# EAGLE board Robo_opcao (EAGLE 9.5.1)
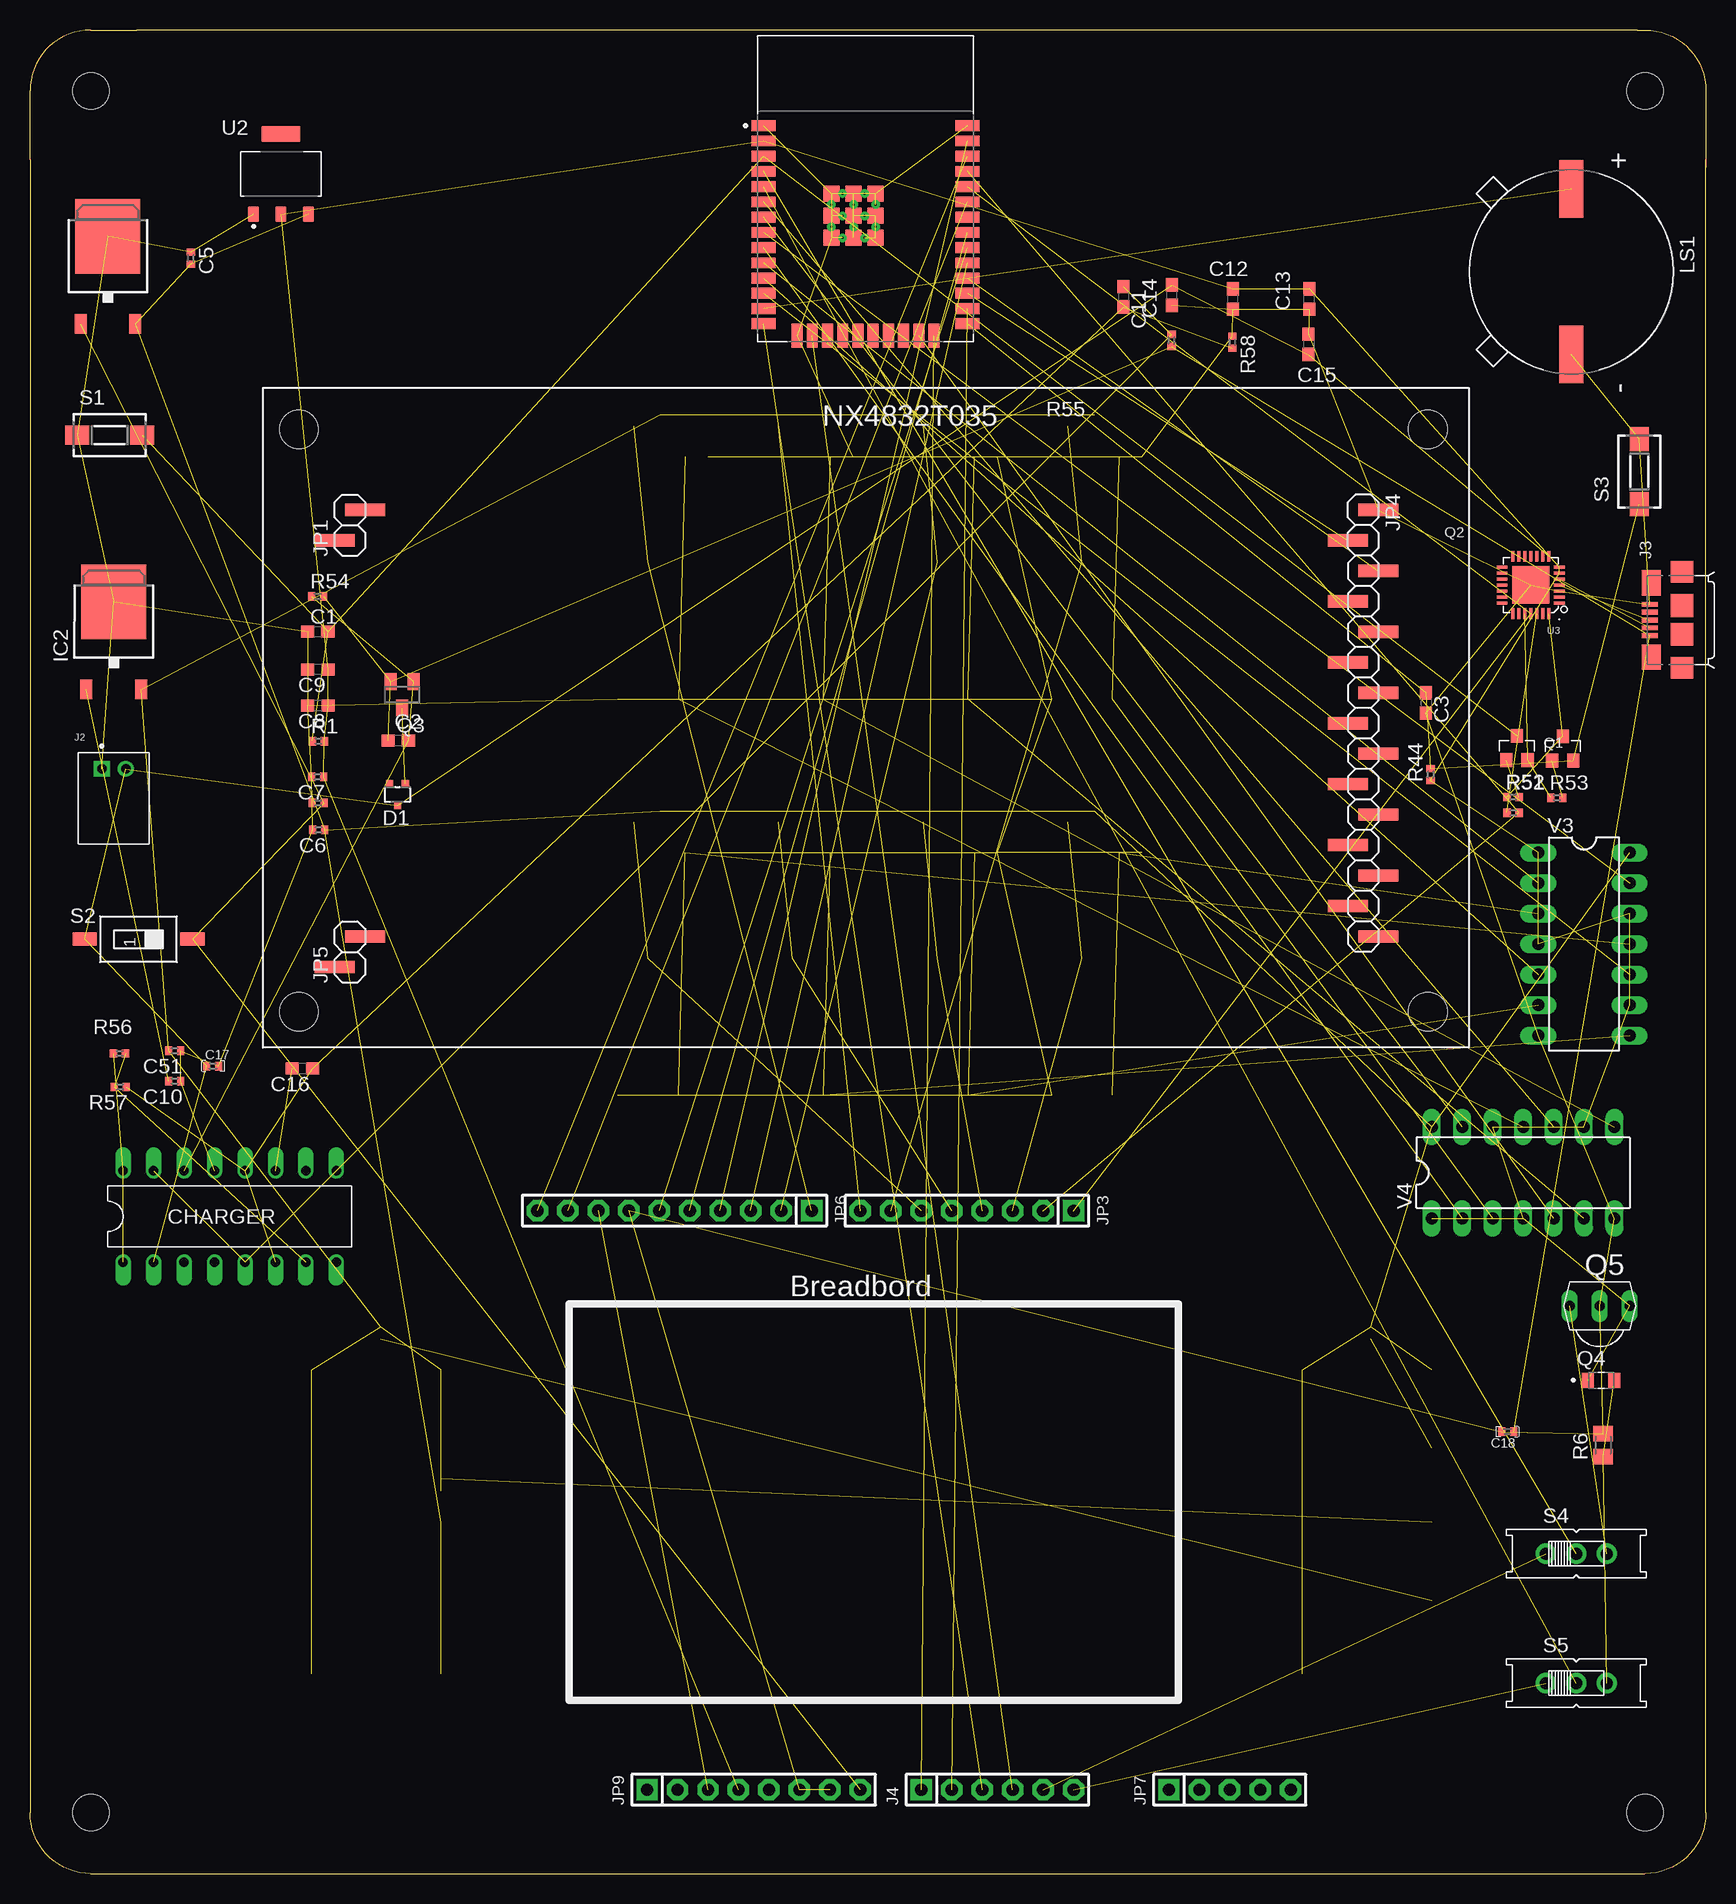
[diagram p0: board, top side]
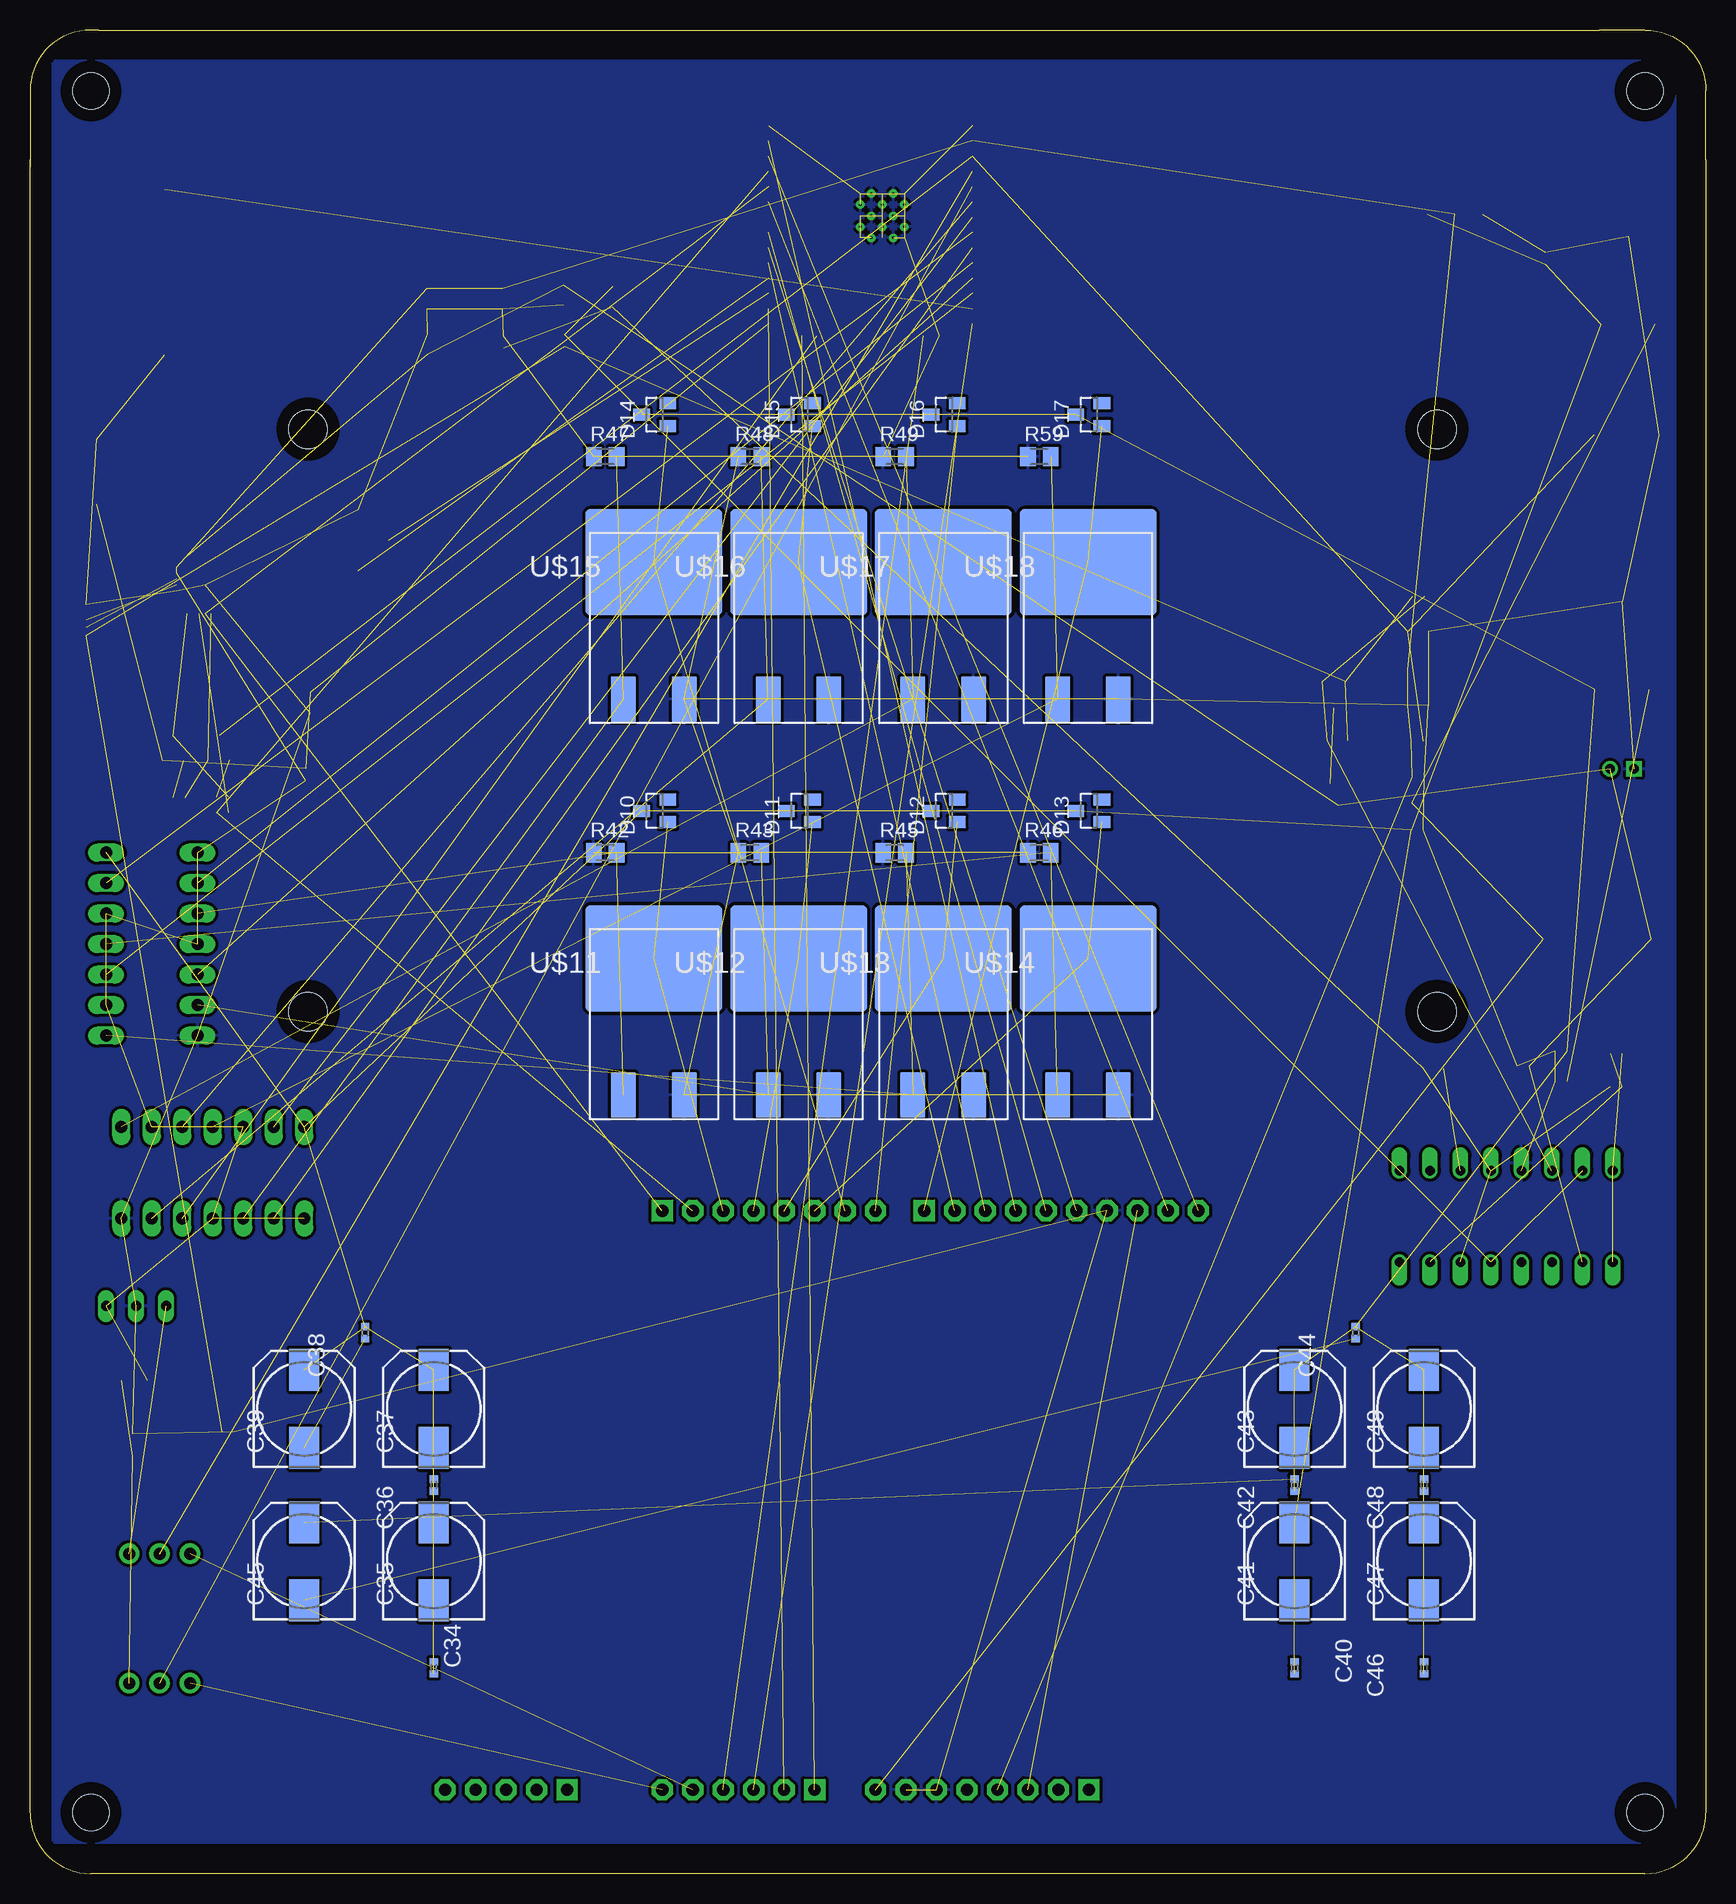
[diagram p1: board, bottom side, seen from below]

Size 139.7 x 153.67 mm. Coordinates in mm from the lower left corner, seen from the top.
Outline: 139.7,142.24 139.7,5.08 arc-90 134.62,0 5.08,0 arc-90 0,5.08 0,142.88 0,148.59 arc-90 5.08,153.67 8.89,153.67 133.99,153.67 134.62,153.67 arc-90 139.7,148.59 139.7,142.24
Outline: 139.7,142.24 139.7,142.88
Copper layers (1*16): Top 0.035mm / dielectric 1.5mm / Bottom 0.035mm
Design rules "default *": minimum track width 8mil, minimum drill 6mil, track to track 6mil, track to pad 6mil, pad to pad 6mil, via to via 6mil, smd to smd 6mil, copper to edge 40mil, drill to drill 6mil, minimum pad ring 10mil, minimum via ring 8mil, stop-mask expansion 4mil, vias tented up to drill 0mil, thermal gap 10mil
Net classes: 0 default: width 0.61 mm, drill 0.61 mm, clearance 0.254 mm; 1 x: width 0.203 mm, drill 0.508 mm, clearance 0.254 mm
Holes 3 mm at 5.08,148.59 5.08,5.08 134.62,148.59 134.62,5.08

## Footprints (pad centres in the part's own frame; a part is rotated, then mirrored left to right if it is on the bottom)
ARDUINO_R3 = drill 1.016 pad 1.93: 3.3V 2.54,-24.13; 5V 5.08,-24.13; A0 17.78,-24.13; A1 20.32,-24.13; A2 22.86,-24.13; A3 25.4,-24.13; A4 27.94,-24.13; A5 30.48,-24.13; AREF -9.144,24.13; D0 30.48,24.13; D1 27.94,24.13; D2 25.4,24.13; D3 22.86,24.13; D4 20.32,24.13; D5 17.78,24.13; D6 15.24,24.13; D7 12.7,24.13; D8 8.636,24.13; D9 6.096,24.13; D10 3.556,24.13; D11 1.016,24.13; D12 -1.524,24.13; D13 -4.064,24.13; GND@1 7.62,-24.13; GND@2 10.16,-24.13; GND@3 -6.604,24.13; GND@4 33.16,-1.32; IOREF -2.54,-24.13; MISO 30.62,3.76; MOSI 33.16,1.22; NC -5.08,-24.13; RESET@1 0,-24.13; RESET@2 30.62,-1.32; SCK 30.62,1.22; SCL -14.224,24.13; SDA -11.684,24.13; VCC 33.16,3.76; VIN 12.7,-24.13 | hole 3.175: -17.78,24.13; 33.02,8.89; 33.02,-19.05; -19.05,-24.13
C0603 = smd 1.1 x 1: 1 -0.85,0; 2 0.85,0
0402 = smd 0.6 x 0.7: 1 -0.5,0; 2 0.5,0
0402_POL = smd 0.6 x 0.7: P+ -0.5,0; P- 0.5,0
150CLZ-0810 = smd 3.5 x 2.5: + 3.25,0; - -3.25,0
DIP14 = drill 0.8 offset: P$1 -3.81,8.89; P$2 -3.81,6.35; P$3 -3.81,3.81; P$4 -3.81,1.27; P$5 -3.81,-1.27; P$6 -3.81,-3.81; P$7 -3.81,-6.35; P$8 -3.81,-8.89; P$9 3.81,-8.89; P$10 3.81,-6.35; P$11 3.81,-3.81; P$12 3.81,-1.27; P$13 3.81,1.27; P$14 3.81,3.81; P$15 3.81,6.35; P$16 3.81,8.89
SOT323 = smd 0.6 x 0.55: 1 -0.65,-0.925; 2 0.65,-0.925; 3 0,0.925
SOT23 = smd 1 x 1.4: 1 -0.95,-1.1; 2 0.95,-1.1; 3 0,1.1
TO252 = smd 1 x 1.6: 1 -2.28,-4.8; 2 2.28,-4.8 | smd 5.4 x 6.2: 3 0,2.5
JST_S2B-PH-K-S(LF)(SN) = drill 0.8 square: 1 -1,0 | drill 0.8: 2 1,0
ZX62-B-5PA(11) = smd 0.4 x 1.35: 1 -1.3,2.675; 2 -0.65,2.675; 3 0,2.675; 4 0.65,2.675; 5 1.3,2.675 | smd 2.1 x 1.6: SH1 -3.1,2.55; SH2 3.1,2.55 | smd 1.8 x 1.9: SH3 -4,0; SH6 4,0 | smd 1.9 x 1.9: SH4 -1.2,0; SH5 1.2,0
SIP-100-06-40 = drill 1.016 pad 1.778 square: 1 -6.35,0 | drill 1.016 pad 1.778 octagon: 2 -3.81,0; 3 -1.27,0; 4 1.27,0; 5 3.81,0; 6 6.35,0
1X02SMD = smd 1.016 x 3.302: 1 -1.27,1.27; 2 1.27,-1.27
SIP-100-08-40 = drill 1.016 pad 1.778 square: 1 -8.89,0 | drill 1.016 pad 1.778 octagon: 2 -6.35,0; 3 -3.81,0; 4 -1.27,0; 5 1.27,0; 6 3.81,0; 7 6.35,0; 8 8.89,0
1X15SMD = smd 1.016 x 3.302: 1 -1.27,1.27; 2 1.27,-1.27; 3 3.81,1.27; 4 6.35,-1.27; 5 8.89,1.27; 6 11.43,-1.27; 7 13.97,1.27; 8 16.51,-1.27; 9 19.05,1.27; 10 21.59,-1.27; 11 24.13,1.27; 12 26.67,-1.27; 13 29.21,1.27; 14 31.75,-1.27; 15 34.29,1.27
SIP-100-10-40 = drill 1.016 pad 1.778 square: 1 -11.43,0 | drill 1.016 pad 1.778 octagon: 2 -8.89,0; 3 -6.35,0; 4 -3.81,0; 5 -1.27,0; 6 1.27,0; 7 3.81,0; 8 6.35,0; 9 8.89,0; 10 11.43,0
SIP-100-05-40 = drill 1.016 pad 1.778 square: 1 -5.08,0 | drill 1.016 pad 1.778 octagon: 2 -2.54,0; 3 0,0; 4 2.54,0; 5 5.08,0
XDCR_CPT-1762_ROBO = smd 4.8 x 2: N 6.9,0; P -6.9,0
SOT-23 = smd 1.016 x 1.143: 1 -0.889,-1.016; 2 0.889,-1.016; 3 0,1.016
TRANS_SFH_3716 = smd 1 x 1.25: 1 -1.1,0; 2 1.1,0
TSOP18XX = drill 0.813 long: GND -0.001,-0.027; OUT -2.501,-0.027; VCC 2.499,-0.027
M0805 = smd 1.3 x 1.6: 1 -0.95,0; 2 0.95,0
DTSM-3 = smd 2 x 1.6: 1 -2.7,0; 2 2.7,0
SMS-001 = smd 1.092 x 2.007: 1 0,-4.496; 2 0,4.496
EG1218_ROBO = drill 1 pad 1.676: O -2.54,0; P 0,0; S 2.54,0
MODULE_ESP32-WROOM-32D = smd 2 x 0.9: 1 -8.5,5.26; 2 -8.5,3.99; 3 -8.5,2.72; 4 -8.5,1.45; 5 -8.5,0.18; 6 -8.5,-1.09; 7 -8.5,-2.36; 8 -8.5,-3.63; 9 -8.5,-4.9; 10 -8.5,-6.17; 11 -8.5,-7.44; 12 -8.5,-8.71; 13 -8.5,-9.98; 14 -8.5,-11.25; 25 8.5,-11.25; 26 8.5,-9.98; 27 8.5,-8.71; 28 8.5,-7.44; 29 8.5,-6.17; 30 8.5,-4.9; 31 8.5,-3.63; 32 8.5,-2.36; 33 8.5,-1.09; 34 8.5,0.18; 35 8.5,1.45; 36 8.5,2.72; 37 8.5,3.99; 38 8.5,5.26 | smd 0.9 x 2: 15 -5.715,-12.25; 16 -4.445,-12.25; 17 -3.175,-12.25; 18 -1.905,-12.25; 19 -0.635,-12.25; 20 0.635,-12.25; 21 1.905,-12.25; 22 3.175,-12.25; 23 4.445,-12.25; 24 5.715,-12.25 | smd 1.33 x 1.33: 39_1 -2.835,-0.405; 39_2 -1,-0.405; 39_3 0.835,-0.405; 39_4 -2.835,-2.24; 39_5 -1,-2.24; 39_6 0.835,-2.24; 39_7 -2.835,-4.075; 39_8 -1,-4.075; 39_9 0.835,-4.075 | drill 0.2 pad 0.3: 39_10 -1.917,-0.405; 39_11 -0.083,-0.405; 39_12 -2.835,-1.323; 39_13 -1,-1.323; 39_14 0.835,-1.323; 39_15 -1.917,-2.24; 39_16 -0.083,-2.24; 39_17 -2.835,-3.158; 39_18 -1,-3.158; 39_19 0.835,-3.158; 39_20 -1.917,-4.075; 39_21 -0.083,-4.075
SOT229P700X180-4N = smd 0.93 x 1.31: 1 -2.29,-3.345; 2 0,-3.345; 3 2.29,-3.345 | smd 3.24 x 1.31: 4 0,3.345
QFN28G_0.5-5X5MM_ROBO = smd 0.9 x 0.254: 1 -2.384,1.5; 2 -2.384,1; 3 -2.384,0.5; 4 -2.384,0; 5 -2.384,-0.5; 6 -2.384,-1; 7 -2.384,-1.5; 15 2.384,-1.5; 16 2.384,-1; 17 2.384,-0.5; 18 2.384,0; 19 2.384,0.5; 20 2.384,1; 21 2.384,1.5 | smd 0.254 x 0.9: 8 -1.5,-2.384; 9 -1,-2.384; 10 -0.5,-2.384; 11 0,-2.384; 12 0.5,-2.384; 13 1,-2.384; 14 1.5,-2.384; 22 1.5,2.384; 23 1,2.384; 24 0.5,2.384; 25 0,2.384; 26 -0.5,2.384; 27 -1,2.384; 28 -1.5,2.384 | smd 3.1 x 3.1: 29 0,0
NEXTION = hole 3.2: 4,50.54; 4,2; 98.1,2; 98.1,50.54
SMD = smd 2.08 x 3.81: 1 2.79,-13.85; 3 7.86,-13.85 | smd 11.43 x 8.89: 2 5.33,-2.45
DIL14_FT = drill 1 long: 1 -7.62,-3.81; 2 -5.08,-3.81; 3 -2.54,-3.81; 4 0,-3.81; 5 2.54,-3.81; 6 5.08,-3.81; 7 7.62,-3.81; 8 7.62,3.81; 9 5.08,3.81; 10 2.54,3.81; 11 0,3.81; 12 -2.54,3.81; 13 -5.08,3.81; 14 -7.62,3.81

## Placement (x,y rotation side)
B1  ARDUINO_UNO_R3  [ARDUINO_R3]  173.35,-31.11 0 top  (outside the outline)
C1  0,1 uF  [C0603]  23.99,103.52 0 top
C2  0,01 uF  [C0603]  30.7,94.46 0 top
C3  0,1 uF  [C0603]  116.36,97.57 270 top
C4  0.33uF  [0402]  24.02,89.24 0 top
C5  0.1uF  [0402]  13.4,134.65 270 top
C6  0.1uF  [0402]  24.07,86.99 180 top
C7  22uF  [0402]  23.97,91.41 180 top
C8  0,1 uF  [C0603]  24,97.34 180 top
C9  10 uF  [C0603]  24.01,100.36 180 top
C10  0.33uF  [0402]  12.06,66.04 180 top
C11  1 uF  [C0603]  91.13,131.44 270 top
C12  10 uF  [C0603]  100.29,131.24 90 top
C13  0,1 uF  [C0603]  106.64,131.24 90 top
C14  0,1 uF  [C0603]  95.21,131.56 90 top
C15  10 uF  [C0603]  106.58,127.48 270 top
C16  0.01 uF  [C0603]  22.7,67.09 180 top
C17  10uF  [0402_POL]  15.24,67.31 0 top
C18  20uF  [0402_POL]  123.19,36.83 180 top
C34  100n  [0402]  106.05,17.14 270 bottom
C35  470u  [150CLZ-0810]  106.05,26.04 90 bottom
C36  100n  [0402]  106.05,32.38 90 bottom
C37  470u  [150CLZ-0810]  106.05,38.73 90 bottom
C38  100n  [0402]  111.76,45.09 90 bottom
C39  470u  [150CLZ-0810]  116.84,38.73 90 bottom
C40  100n  [0402]  34.29,17.14 270 bottom
C41  470u  [150CLZ-0810]  34.29,26.04 90 bottom
C42  100n  [0402]  34.29,32.38 90 bottom
C43  470u  [150CLZ-0810]  34.29,38.73 90 bottom
C44  100n  [0402]  29.21,45.09 90 bottom
C45  470u  [150CLZ-0810]  116.84,26.04 90 bottom
C46  100n  [0402]  23.5,17.14 90 bottom
C47  470u  [150CLZ-0810]  23.5,26.04 90 bottom
C48  100n  [0402]  23.5,32.38 90 bottom
C49  470u  [150CLZ-0810]  23.5,38.73 90 bottom
C51  0.1uF  [0402]  12.06,68.58 180 top
CHARGER  MAX712  [DIP14]  16.65,54.78 90 top
D1  HSMS-285B  [SOT323]  30.64,89.95 180 top
D10  BAS40  [SOT23]  87.63,88.58 90 bottom
D11  BAS40  [SOT23]  75.56,88.58 90 bottom
D12  BAS40  [SOT23]  63.5,88.58 90 bottom
D13  BAS40  [SOT23]  51.44,88.58 90 bottom
D14  BAS40  [SOT23]  87.63,121.6 90 bottom
D15  BAS40  [SOT23]  75.56,121.6 90 bottom
D16  BAS40  [SOT23]  63.5,121.6 90 bottom
D17  BAS40  [SOT23]  51.44,121.6 90 bottom
IC1  7805DT  [TO252]  6.49,133.97 0 top
IC2  7805DT  [TO252]  6.99,103.5 0 top
J2  S2B-PH-K-S(LF)(SN)  [JST_S2B-PH-K-S(LF)(SN)]  6.99,92.08 0 top
J3  ZX62-B-5PA  [ZX62-B-5PA(11)]  137.71,104.49 90 top
J4  F-1X06-SIP-100-40  [SIP-100-06-40]  80.64,6.99 0 top
JP1  [1X02SMD]  26.67,112.39 90 top
JP3  F-1X08-SIP-100-40  [SIP-100-08-40]  78.11,55.24 180 top
JP4  [1X15SMD]  111.12,112.39 270 top
JP5  [1X02SMD]  26.67,76.83 90 top
JP6  F-1X10-SIP-100-40  [SIP-100-10-40]  53.73,55.25 180 top
JP7  F-1X05-SIP-100-40  [SIP-100-05-40]  100.01,6.99 0 top
JP9  F-1X08-SIP-100-40  [SIP-100-08-40]  60.33,6.99 0 top
LS1  CPT-1762-90-SMT-TRXDCR_CPT-1762_ROBO  [XDCR_CPT-1762_ROBO]  128.48,133.52 270 top
Q1  SMD-TRANSISTORS-NPN-25V-500MW(SOT-23)  [SOT-23]  123.95,93.82 0 top
Q2  SMD-TRANSISTORS-NPN-25V-500MW(SOT-23)  [SOT-23]  127.76,93.79 0 top
Q3  [SOT23]  31.02,98.27 180 top
Q4  SFH_3716  [TRANS_SFH_3716]  130.97,41.12 0 top
Q5  TSOP4838  [TSOP18XX]  130.85,47.33 0 top
R1  10k  [0402]  24.04,94.39 0 top
R6  1k  [M0805]  131.13,35.72 90 top
R42  10k  [M0805]  91.76,85.09 0 bottom
R43  10k  [M0805]  79.69,85.09 0 bottom
R44  10k  [0402]  116.74,91.6 90 top
R45  10k  [M0805]  67.63,85.09 0 bottom
R46  10k  [M0805]  55.56,85.09 0 bottom
R47  10k  [M0805]  91.76,118.11 0 bottom
R48  10k  [M0805]  79.69,118.11 0 bottom
R49  10k  [M0805]  67.63,118.11 0 bottom
R51  470R  [0402]  123.62,88.42 0 top
R52  10k  [0402]  123.62,89.74 0 top
R53  10k  [0402]  127.27,89.68 0 top
R54  150R  [0402]  23.97,106.46 0 top
R55  680R  [0402]  95.15,127.79 270 top
R56  68k  [0402]  7.46,68.36 0 top
R57  22k  [0402]  7.52,65.56 180 top
R58  1R  [0402]  100.23,127.64 270 top
R59  10k  [M0805]  55.56,118.11 0 bottom
S1  EN  [DTSM-3]  6.64,119.89 0 top
S2  SWS001  [SMS-001]  9.05,77.89 270 top
S3  BOOT  [DTSM-3]  134.16,116.85 90 top
S4  EG1218  [EG1218_ROBO]  128.91,26.67 0 top
S5  EG1218  [EG1218_ROBO]  128.91,15.88 0 top
U1  ESP32-WROOM-32D  [MODULE_ESP32-WROOM-32D]  69.65,140.43 0 top
U2  AMS1117-3.3  [SOT229P700X180-4N]  20.93,141.67 0 top
U3  INTERFACE-CP2102-GMR(QFN28)QFN28G_ROBO  [QFN28G_0.5-5X5MM_ROBO]  125.09,107.41 180 top
U$1  [NEXTION]  18.42,69.85 0 top
U$11  IRFZ44NSMD  [SMD]  93.03,78.74 0 bottom
U$12  IRFZ44NSMD  [SMD]  80.96,78.74 0 bottom
U$13  IRFZ44NSMD  [SMD]  68.9,78.74 0 bottom
U$14  IRFZ44NSMD  [SMD]  56.83,78.74 0 bottom
U$15  IRFZ44NSMD  [SMD]  93.03,111.76 0 bottom
U$16  IRFZ44NSMD  [SMD]  80.96,111.76 0 bottom
U$17  IRFZ44NSMD  [SMD]  68.9,111.76 0 bottom
U$18  IRFZ44NSMD  [SMD]  56.83,111.76 0 bottom
V3  7408  [DIL14_FT]  129.54,77.47 270 top
V4  7408  [DIL14_FT]  124.46,58.42 0 top

## Library data of the parts
B1 = SparkFun-Boards
C1-C3 C8 C9 C11-C16 C35 C37 C39 C41 C43 C45 C47 C49 = rcl; SPICEPREFIX: C
C4-C7 C10 C17 C18 C34 C36 C38 C40 C42 C44 C46 C48 C51 R1 R44 R51-R58 = Perfect_0402
CHARGER = MAX712; AVAILABILITY: Unavailable; DESCRIPTION: Charger IC Multi-Chemistry 16-SOIC; MF: Maxim Integrated; MP: MAX712; PACKAGE: SOIC-16 Maxim Integrated; PRICE: None
D1 = avago
D10-D17 = diode
IC1 IC2 = linear
J2 = S2B-PH-K-S_LF__SN_; DESCRIPTION: Connector Header Through Hole, Right Angle 2 position; DIGI-KEY_PART_NUMBER: 455-1719-ND; MF: JST Sales America Inc.; MP: S2B-PH-K-S(LF)(SN); PACKAGE: Custom Package JST Sales America Inc.
J3 = ZX62-B-5PA; DESCRIPTION: USB - micro B USB 2.0 Receptacle Connector 5 Position Surface Mount, Right Angle; DIGI-KEY_PART_NUMBER: H11579CT-ND; MF: Hirose; MP: ZX62-B-5PA; PACKAGE: None
J4 JP3 JP6 JP7 JP9 = con-headers-jp(1)
JP1 JP4 JP5 = pinhead-1
LS1 = CPT-1762-90-SMT-TR
Q1 Q2 = SMD-TRANSISTORS-NPN-25V-500MW_SOT-23_; AVAILABILITY: Unavailable; DESCRIPTION: Bipolar (BJT) Transistor NPN 25V 1.5A 100MHz 625mW Surface Mount SOT-23; MF: Recom Power; MP: S8050; PACKAGE: SOT-23 Micro Commercial; PRICE: None
Q3 = semicon-smd-ipc
Q4 = SFH_3716; DESCRIPTION: Phototransistors 570nm Top View 0805 (2012 Metric); DIGI-KEY_PART_NUMBER: SFH3716-ND; MF: OSRAM Opto; MP: SFH 3716; PACKAGE: 0805 OSRAM Opto Semiconductors Inc.
Q5 = tsop
R6 R42 R43 R45-R49 R59 = rcl; SPICEPREFIX: R
S1 S3 = switch-tact
S2 = smd-special
S4 S5 = EG1218(1)
U1 = ESP32-WROOM-32D; AVAILABILITY: Unavailable; DESCRIPTION: Bluetooth, WiFi 802.11b/g/n, Bluetooth v4.2 +EDR, Class 1, 2 and 3 Transceiver Module 2.4GHz ~ 2.5GHz Integrated, Trace Surface Mount; MF: Espressif Systems; MP: ESP32-WROOM-32D; PACKAGE: Module Espressif Systems; PRICE: None
U2 = AMS1117-3.3; AVAILABILITY: Unavailable; DESCRIPTION: Sot223/Pkg 1-Amp 3.3-Volt Low Drop Out Voltage Regulatator; MF: Advanced Monolithic Systems; MP: AMS1117-3.3; PACKAGE: None; PRICE: None
U3 = INTERFACE-CP2102-GMR_QFN28_
U$1 = Nextion
U$11-U$18 = IRFZ44N
V3 V4 = 74ttl-din_modified

## Nets
5V: JP4.4
5V(ATENçãO)-NãOESTACONECTADOEMNDA: JP9.5
5V(NAOTACONECTADOEMNDA): JP9.2
B+ [x]: C14.2 C15.2 C17.P+ CHARGER.P$2 D1.3 J2.2 S2.1 U3.8
B-: C11.2 C16.1 CHARGER.P$6 CHARGER.P$12 R57.1 R58.2
BUZZER: LS1.P U1.13
CTS: U3.23
DC_IN [x]: C2.1 C18.P+ J3.1 Q3.2 R54.2 R55.2
DTR [x]: Q2.3 R52.1 U3.28
EN: C1.2 Q1.3 R1.1 S1.2 U1.3
GND [x]: C1.1 C3.2 C4.1 C5.1 C6.2 C7.2 C8.2 C9.2 C10.1 C12.1 C13.1 C14.1 C15.1 C17.P- C18.P- C51.1 CHARGER.P$13 IC1.3 IC2.3 J2.1 J3.5 JP4.1 JP6.7 JP9.6 JP9.7 LS1.N Q5.GND R6.2 R42.1 R43.1 R45.1 R46.1 R47.1 R48.1 R49.1 R58.1 R59.1 S1.1 S3.2 U1.1 U1.15 U1.38 U1.39_1 U1.39_2 U1.39_3 U1.39_4 U1.39_5 U1.39_6 U1.39_7 U1.39_8 U1.39_9 U1.39_10 U1.39_11 U1.39_12 U1.39_13 U1.39_14 U1.39_15 U1.39_16 U1.39_17 U1.39_18 U1.39_19 U1.39_20 U1.39_21 U2.1 U3.3 U3.29 U$11.3 U$12.3 U$13.3 U$14.3 U$15.3 U$16.3 U$17.3 U$18.3 V3.7 V4.7
GND_PWM~5V: C5.2 C6.1 C34.2 C35.+ C36.2 C37.+ C38.2 C39.+ C40.2 C41.+ D10.3 D11.3 D12.3 D13.3 IC1.2 U2.3 V3.14 V4.14
GND_PWM~5V1(2): C42.2 C43.+ C44.2 C45.+ C46.2 C47.+ C48.2 C49.+ C51.2 D14.3 D15.3 D16.3 D17.3 IC2.2
I2C_SCL: JP6.10 U1.36
I2C_SDA: JP6.9 U1.33
IO0: C3.1 Q2.2 R44.2 S3.1 U1.25
IO2: J4.1 U1.24
IO4: J4.2 U1.26
IO5-SPI: JP6.3 U1.29
IO12: J4.3 U1.14
IO13: J4.4 U1.16
IO15: U1.23 V4.5
IO15-5V: D15.1 JP6.2 U$16.2
IO18-SPI: JP6.6 U1.30
IO19-SPI: JP6.5 U1.31
IO23-SPI: JP6.4 U1.37
IO25: U1.10 V3.2
IO25-5V: D10.1 JP3.3 U$11.2
IO26: U1.11 V3.5
IO26-5V: D11.1 JP3.4 U$12.2
IO27: U1.12 V3.10
IO27-5V: D12.1 JP3.5 U$13.2
IO32: U1.8 V3.13
IO32-5V: D13.1 JP3.6 U$14.2
IO33: U1.9 V4.2
IO33-5V: D14.1 JP3.7 U$15.2
IO34: U1.6 V4.10
IO34-5V: D16.1 JP3.8 U$17.2
IO35: U1.7 V4.13
IO35-5V: D17.1 JP6.1 U$18.2
MISO: U1.22
MOSI: U1.21
N$3 [x]: R51.1 U3.26
N$12: C34.1 C35.-
N$13: C36.1 C37.-
N$14: Q1.1 R52.2
N$15: C38.1 C39.-
N$16: C40.1 C41.-
N$17: C42.1 C43.-
N$18: C44.1 C45.-
N$19: C46.1 C47.-
N$20: C48.1 C49.-
N$25: Q2.1 R53.2
N$26: C2.2 CHARGER.P$14 Q3.1 R54.1
N$28: R42.2 U$11.1 V3.3
N$30: D1.1 Q3.3
N$31: C16.2 CHARGER.P$11
N$32: CHARGER.P$1 CHARGER.P$16 R56.1
N$33: R43.2 U$12.1 V3.6
N$34: R45.2 U$13.1 V3.8
N$36: R46.2 U$14.1 V3.11
N$37: R47.2 U$15.1 V4.3
N$38: R48.2 U$16.1 V4.6
N$39: R49.2 U$17.1 V4.8
N$40: R59.2 U$18.1 V4.11
RESET: JP6.8 JP9.3
RTS [x]: Q1.2 R53.1 U3.24
RX0 [x]: JP3.1 U1.34 U3.25
SCK: U1.20
SCREEN_RX: JP4.2 U1.27
SCREEN_TX: JP4.3 U1.28
TEMP: CHARGER.P$7 R56.2 R57.2
TX0: JP3.2 R51.2 U1.35
USB_DN [x]: J3.2 U3.5
USB_DP [x]: J3.3 U3.4
V+: C11.1 CHARGER.P$5 CHARGER.P$15 R55.1
VDD33 [x]: C7.1 C8.1 C9.1 C12.2 C13.2 JP9.4 Q4.1 Q5.VCC R1.2 R44.1 U1.2 U2.2 U3.6 U3.7 V3.1 V3.4 V3.9 V3.12 V4.1 V4.4 V4.9 V4.12
VIN: C4.2 IC1.1 JP9.8 S2.2
VIN1: C10.2 IC2.1
VN_SENSOR: S5.P U1.5
VN_SENSOR_IN: J4.6 S5.O
VN_SENSOR_LDR: Q4.2 R6.1 S5.S
VP_SENSOR: S4.P U1.4
VP_SENSOR_IN: J4.5 S4.O
VP_SENSOR_IR: Q5.OUT S4.S

## Tracks (layer width: path | path; a pad name or v marks a point on that pad's centre or on a via)
B+  (7 unrouted)
B-  (5 unrouted)
BUZZER  (1 unrouted)
DC_IN  (5 unrouted)
DTR  (2 unrouted)
EN  (4 unrouted)
GND  (75 unrouted)
  pour Bottom: 2.54,2.54 137.79,2.54 137.79,151.13 2.54,151.13
GND_PWM~5V  (17 unrouted)
GND_PWM~5V1(2)  (13 unrouted)
I2C_SCL  (1 unrouted)
I2C_SDA  (1 unrouted)
IO0  (4 unrouted)
IO2  (1 unrouted)
IO4  (1 unrouted)
IO5-SPI  (1 unrouted)
IO12  (1 unrouted)
IO13  (1 unrouted)
IO15  (1 unrouted)
IO15-5V  (2 unrouted)
IO18-SPI  (1 unrouted)
IO19-SPI  (1 unrouted)
IO23-SPI  (1 unrouted)
IO25  (1 unrouted)
IO25-5V  (2 unrouted)
IO26  (1 unrouted)
IO26-5V  (2 unrouted)
IO27  (1 unrouted)
IO27-5V  (2 unrouted)
IO32  (1 unrouted)
IO32-5V  (2 unrouted)
IO33  (1 unrouted)
IO33-5V  (2 unrouted)
IO34  (1 unrouted)
IO34-5V  (2 unrouted)
IO35  (1 unrouted)
IO35-5V  (2 unrouted)
N$3  (1 unrouted)
N$12  (1 unrouted)
N$13  (1 unrouted)
N$14  (1 unrouted)
N$15  (1 unrouted)
N$16  (1 unrouted)
N$17  (1 unrouted)
N$18  (1 unrouted)
N$19  (1 unrouted)
N$20  (1 unrouted)
N$25  (1 unrouted)
N$26  (3 unrouted)
N$28  (2 unrouted)
N$30  (1 unrouted)
N$31  (1 unrouted)
N$32  (2 unrouted)
N$33  (2 unrouted)
N$34  (2 unrouted)
N$36  (2 unrouted)
N$37  (2 unrouted)
N$38  (2 unrouted)
N$39  (2 unrouted)
N$40  (2 unrouted)
RESET  (1 unrouted)
RTS  (2 unrouted)
RX0  (2 unrouted)
SCREEN_RX  (1 unrouted)
SCREEN_TX  (1 unrouted)
TEMP  (2 unrouted)
TX0  (2 unrouted)
USB_DN  (1 unrouted)
USB_DP  (1 unrouted)
V+  (3 unrouted)
VDD33  (21 unrouted)
VIN  (3 unrouted)
VIN1  (1 unrouted)
VN_SENSOR  (1 unrouted)
VN_SENSOR_IN  (1 unrouted)
VN_SENSOR_LDR  (2 unrouted)
VP_SENSOR  (1 unrouted)
VP_SENSOR_IN  (1 unrouted)
VP_SENSOR_IR  (1 unrouted)

## Text on the board
tNames: NX4832T035 | Breadbord